# EAGLE board RS_Latch (EAGLE 9.2.2)
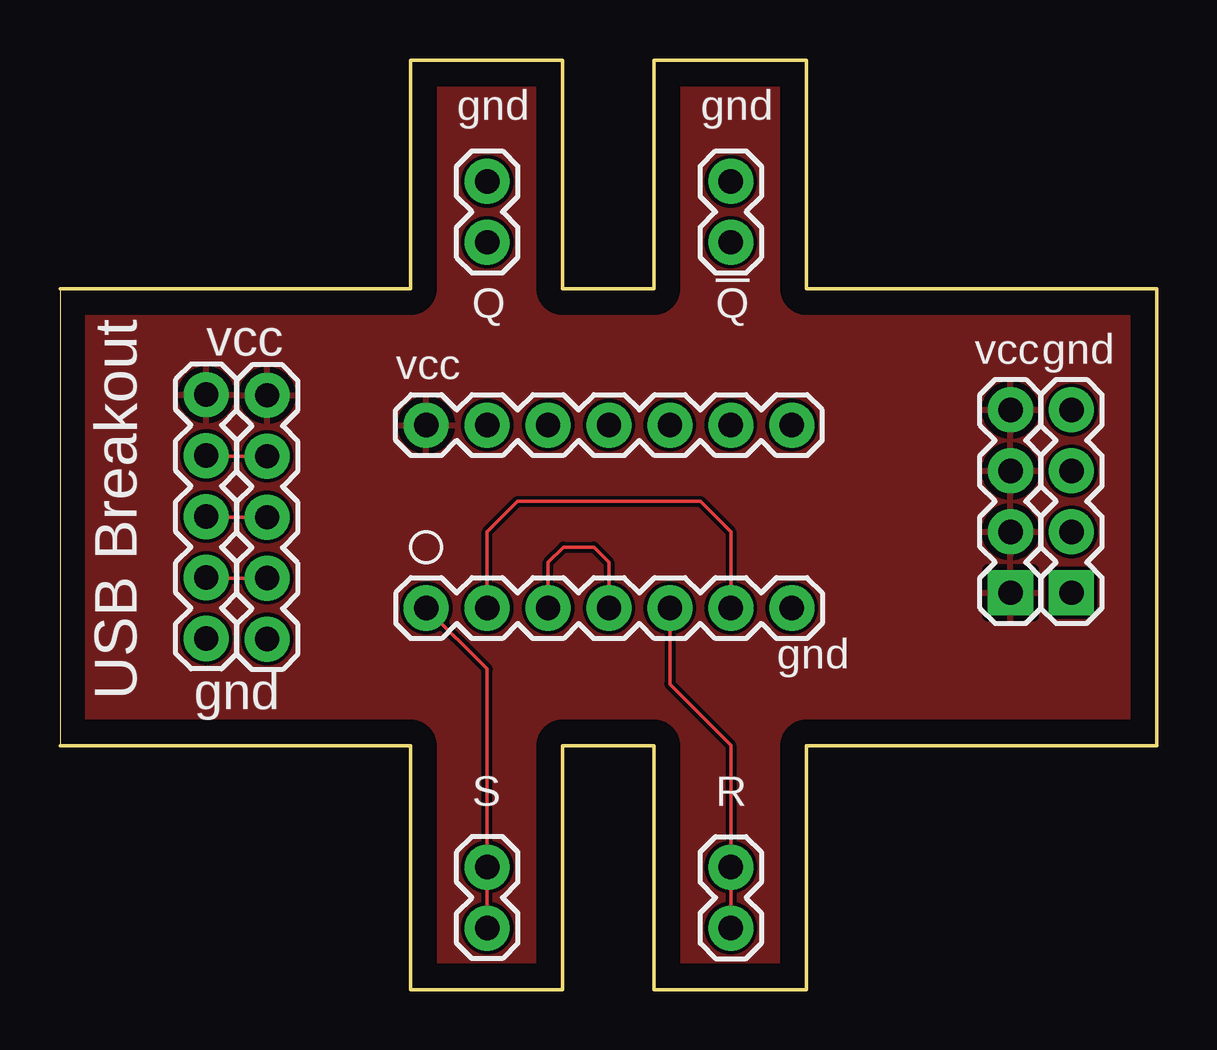
[diagram p0: board, top side]
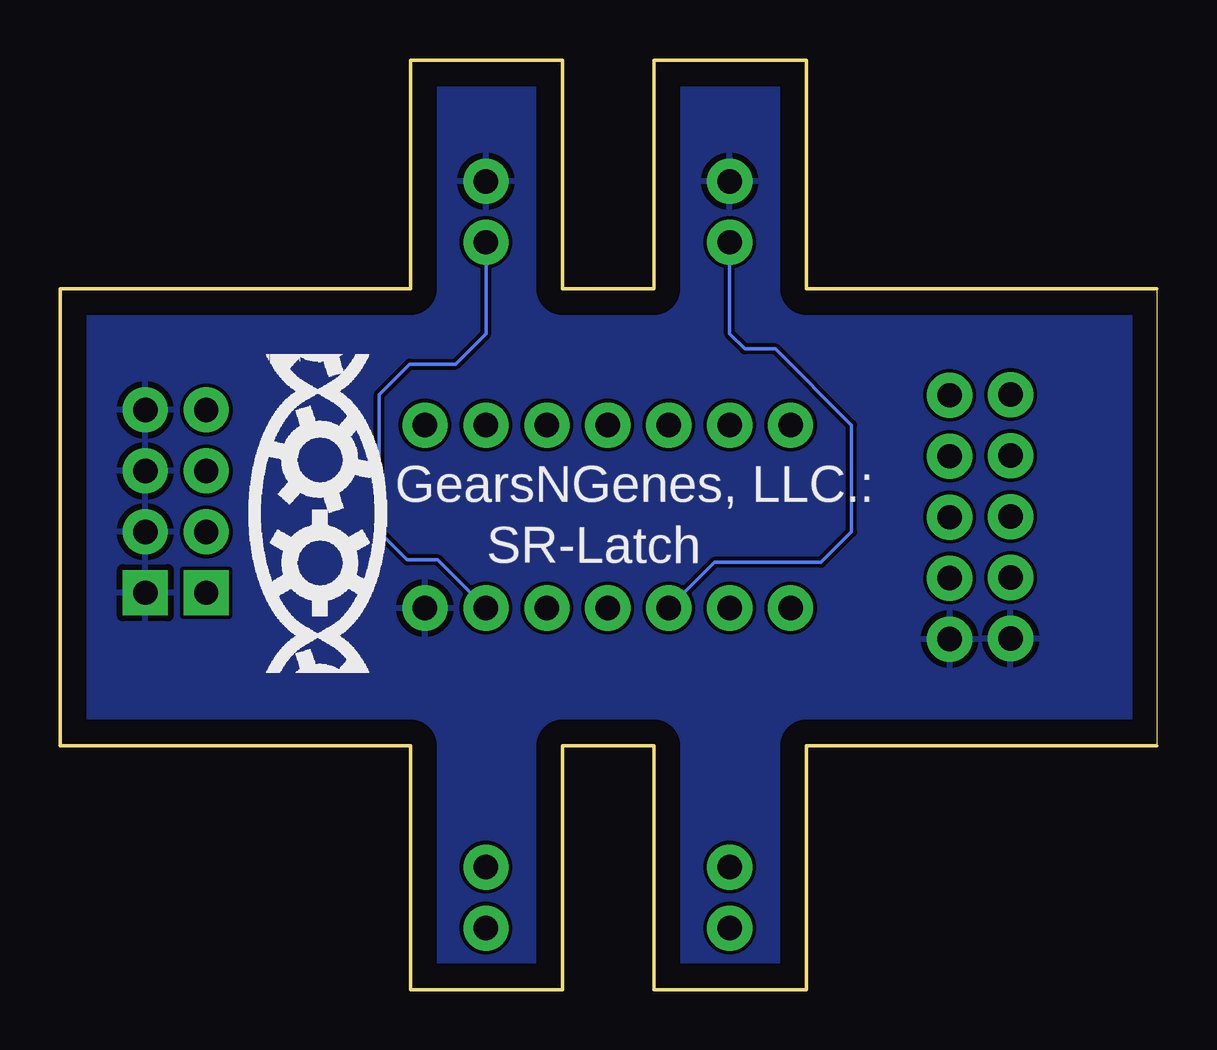
[diagram p1: board, bottom side, seen from below]

Size 45.72 x 38.73 mm. Coordinates in mm from the lower left corner, seen from the top.
Outline: 0,29.21 0,10.16 14.61,10.16 14.61,0 20.95,0 20.95,10.16 24.77,10.16 24.77,0 31.12,0 31.12,10.16 45.72,10.16 45.72,29.21 31.12,29.21 31.12,38.73 24.77,38.73 24.77,29.21 20.95,29.21 20.95,38.73 14.61,38.73 14.61,29.21 0,29.21
Copper layers (1*16): Top 0.035mm / dielectric 1.5mm / Bottom 0.035mm
Design rules "default": minimum track width 6mil, minimum drill 0.35mm, track to track 6mil, track to pad 6mil, pad to pad 6mil, via to via 6mil, smd to smd 6mil, copper to edge 40mil, drill to drill 6mil, minimum pad ring 10mil, minimum via ring 8mil, stop-mask expansion 4mil, vias tented up to drill 0mil, thermal gap 10mil

## Footprints (pad centres in the part's own frame; a part is rotated, then mirrored left to right if it is on the bottom)
1X07 = drill 1.016 pad 1.88: 1 0,0; 2 2.54,0; 3 5.08,0; 4 7.62,0; 5 10.16,0; 6 12.7,0; 7 15.24,0
1X02 = drill 1.016 pad 1.88: 1 0,0; 2 2.54,0
1X05 = drill 1.016 pad 1.88: 1 0,0; 2 2.54,0; 3 5.08,0; 4 7.62,0; 5 10.16,0
1X04 = drill 1.016 pad 1.88 square: 1 0,0 | drill 1.016 pad 1.88: 2 2.54,0; 3 5.08,0; 4 7.62,0

## Placement (x,y rotation side)
J1  [1X07]  30.51,23.52 180 top
J2  [1X02]  17.81,5.11 270 top
J3  [1X07]  15.27,15.9 0 top
J4  [1X02]  27.97,2.57 90 top
J5  [1X02]  17.81,31.14 90 top
J6  [1X02]  27.97,31.14 90 top
J7  [1X05]  6.1,24.79 270 top
J8  [1X05]  8.64,24.76 270 top
J9  [1X04]  39.62,16.54 90 top
J10  [1X04]  42.16,16.54 90 top

## Library data of the parts
J1-J8 = MG-Eagle_v1
J9 J10 = MG-Eagle_v1; PROD_ID: CONN-09696

## Nets
GND: J3.7 J5.2 J6.2 J7.5 J8.5 J10.1 J10.2 J10.3 J10.4
N$1: J2.1 J2.2 J3.1
N$2: J3.5 J4.1 J4.2
N$3: J7.2 J8.2
N$4: J7.3 J8.3
N$5: J7.4 J8.4
VCC: J1.7 J7.1 J8.1 J9.1 J9.2 J9.3 J9.4
Y1: J3.3 J3.4 J5.1
Y2: J3.2 J3.6 J6.1

## Tracks (layer width: path | path; a pad name or v marks a point on that pad's centre or on a via)
GND
  pour Bottom: -12.37,-18.41 -12.37,48.46 61.16,48.46 61.16,-18.41
N$1
  Top 0.152: J2.2 J2.1 17.8,13.36 J3.1
N$2
  Top 0.152: J3.5 25.43,12.72 27.97,10.18 J4.2 J4.1
N$3
  Top 0.152: J7.2 6.12,22.22 J8.2
N$4
  Top 0.152: J8.3 6.12,19.68 J7.3
N$5
  Top 0.152: J7.4 6.12,17.14 J8.4
VCC
  pour Top: -12.37,-17.14 -12.37,48.46 55.42,48.46 55.42,-17.14
Y1
  Top 0.152: J3.3 20.34,17.8 20.98,18.44 22.25,18.44 22.88,17.8 J3.4
  Bottom 0.152: J3.3 18.44,17.8 13.99,17.8 12.73,19.07 12.73,23.52 15.9,26.69 17.17,26.69 17.8,27.33 J5.1
Y2
  Top 0.152: J3.6 27.97,19.07 26.7,20.35 19.08,20.35 17.8,19.07 J3.2
  Bottom 0.152: J6.1 27.97,27.33 29.23,26.06 31.14,26.06 32.41,24.79 32.41,19.07 31.24,17.91 29.97,17.91 J3.6

## Text on the board
tPlace: gnd | gnd | Q | !Q | vcc | vcc | gnd | vcc | gnd | USB Breakout | gnd | S | R
bPlace: GearsNGenes, LLC.: | SR-Latch